# Altium PCB ControllerMain_V1.PcbDoc (part 2 of 2)
Units mil, origin at the board's own origin, x right, y up, seen from the top; angles counter-clockwise.
Board outline 3937.01 x 590.55 mil, 4 copper layers (Top Layer, Layer 1, Layer 2, Bottom Layer), stack 23.756 mil thick; 51 components, 76 nets, 244 pads, 93 vias.
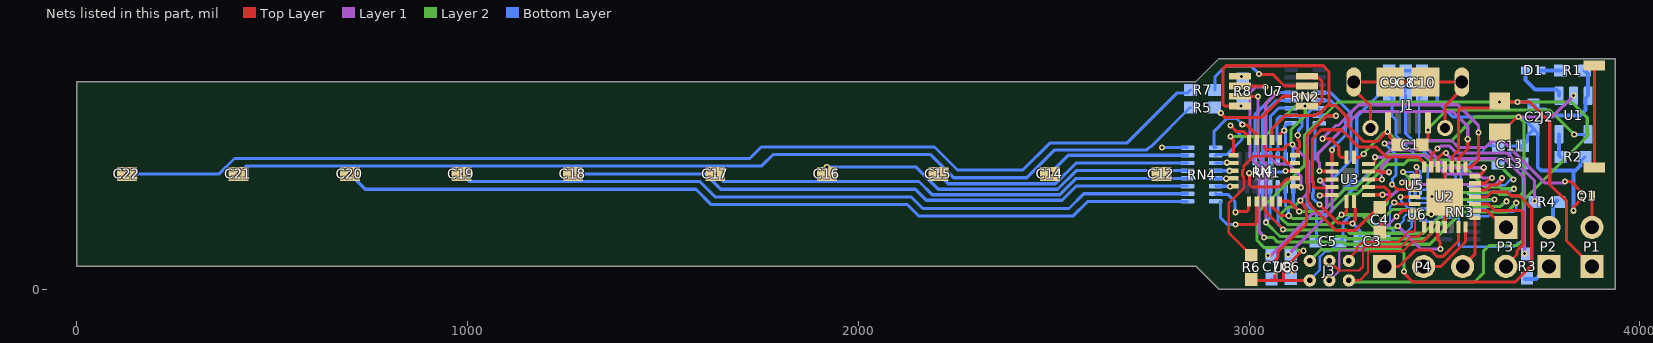
[diagram p4: the nets of this part, all layers, seen from the top]

## Part data
C1: library part CAP_4U7_0603, "CAP CER 4.7UF 25V X5R 0603", Supplier Part Number 1=445-9050-1-ND, LatestRevisionDate=17-Jul-2002, LatestRevisionNote="Re-released for DXP Platform.", PackageDescription="Radial Cap, Thru-Hole; 2 Leads; 0.3 in Pin Spacing", PackageReference=RAD-0.3, Published=8-Jun-2000, Publisher="Altium Limited", Supplier 1=Digi-Key
C2: library part CAP_10U_0603, "CAP CER 10UF 10V X5R 0603", Supplier Part Number 1=490-10474-1-ND, LatestRevisionDate=17-Jul-2002, LatestRevisionNote="Re-released for DXP Platform.", PackageDescription="Radial Cap, Thru-Hole; 2 Leads; 0.3 in Pin Spacing", PackageReference=RAD-0.3, Published=8-Jun-2000, Publisher="Altium Limited", Supplier 1=Digi-Key
C3 C4 C5 C6 C7 C8 C9 C10 C11 C13: library part CAP_1U_0603, "CAP CER 1UF 50V X7R 0603", Supplier Part Number 1=490-12330-1-ND, LatestRevisionDate=17-Jul-2002, LatestRevisionNote="Re-released for DXP Platform.", PackageDescription="Radial Cap, Thru-Hole; 2 Leads; 0.3 in Pin Spacing", PackageReference=RAD-0.3, Published=8-Jun-2000, Publisher="Altium Limited", Supplier 1=Digi-Key
C12: library part CAP_TOUCH_SLIDE1_END2, "Touch Sensor Pad, Slide Style 1", LatestRevisionDate=17-Jul-2002, LatestRevisionNote="Re-released for DXP Platform.", PackageDescription="Radial Cap, Thru-Hole; 2 Leads; 0.3 in Pin Spacing", PackageReference=RAD-0.3, Published=8-Jun-2000, Publisher="Altium Limited"
C14 C15 C16 C17 C18 C19 C20 C21: library part CAP_TOUCH_SLIDE1, "Touch Sensor Pad, Slide Style 1", LatestRevisionDate=17-Jul-2002, LatestRevisionNote="Re-released for DXP Platform.", PackageDescription="Radial Cap, Thru-Hole; 2 Leads; 0.3 in Pin Spacing", PackageReference=RAD-0.3, Published=8-Jun-2000, Publisher="Altium Limited"
C22: library part CAP_TOUCH_SLIDE1_END1, "Touch Sensor Pad, Slide Style 1", LatestRevisionDate=17-Jul-2002, LatestRevisionNote="Re-released for DXP Platform.", PackageDescription="Radial Cap, Thru-Hole; 2 Leads; 0.3 in Pin Spacing", PackageReference=RAD-0.3, Published=8-Jun-2000, Publisher="Altium Limited"
D1: "LED GREEN CLEAR CHIP SMD", Supplier Part Number 1=754-1101-1-ND, Supplier 1=Digi-Key
J1: library part MicroUSB, "SMD+DIP Micro USB; MICRO-B-SMD", Package=None, Supplier Part Number 1=H125272CT-ND, Availability=Unavailable, MF=Hirose, MP=ZX62D-B-5P8, Price=None, SnapEDA_Link=https://www.snapeda.com/parts/ZX62D-B-5P8/Hirose%20Electric%20Co%20Ltd/view-part/?ref=snap, Supplier 1=Digi-Key
J2: library part SNAPBEE_DF59-2S-2V, "CONN SSL RCPT 2POS 2MM SOLDER", Supplier Part Number 1=H11961CT-ND, Supplier 1=Digi-Key, Supplier 2=Digi-Key, Supplier 3=Digi-Key, Supplier Part Number 2=H11958-ND, Supplier Part Number 3=H11957CT-ND
J3: library part ISP_TINY
P1: "Polarity"
Q1: "MOSFET N-CH 30V 3.1A 3PICOSTAR", Package=None, Supplier Part Number 1=296-38913-1-ND, Availability=Unavailable, MF="{'manufacturer': u'Texas Instruments'}", MP=CSD17381F4, Price=None, Supplier 1=Digi-Key
R1: library part RES_220R_0603, "RES SMD 220 OHM 1% 1/10W 0603", Supplier Part Number 1=541-220HCT-ND, LatestRevisionDate=17-Jul-2002, LatestRevisionNote="Re-released for DXP Platform.", PackageDescription="Axial Device, Thru-Hole; 2 Leads; 0.3 in Pin Spacing", PackageReference=AXIAL-0.3, Published=8-Jun-2000, Publisher="Altium Limited", Supplier 1=Digi-Key
R2: library part RES_2K2_0603, "RES SMD 2.2K OHM 1% 1/10W 0603", Supplier Part Number 1=311-2.20KHRCT-ND, LatestRevisionDate=17-Jul-2002, LatestRevisionNote="Re-released for DXP Platform.", PackageDescription="Axial Device, Thru-Hole; 2 Leads; 0.3 in Pin Spacing", PackageReference=AXIAL-0.3, Published=8-Jun-2000, Publisher="Altium Limited", Supplier 1=Digi-Key
R3 R4: library part RES_100R_0603, "RES SMD 100 OHM 1% 1/10W 0603", Supplier Part Number 1=311-100HRCT-ND, LatestRevisionDate=17-Jul-2002, LatestRevisionNote="Re-released for DXP Platform.", PackageDescription="Axial Device, Thru-Hole; 2 Leads; 0.3 in Pin Spacing", PackageReference=AXIAL-0.3, Published=8-Jun-2000, Publisher="Altium Limited", Supplier 1=Digi-Key
R5 R7: library part RES_4K99_0603, "RES SMD 4.99K OHM 1% 1/10W 0603", Supplier Part Number 1=541-4.99KHCT-ND, LatestRevisionDate=17-Jul-2002, LatestRevisionNote="Re-released for DXP Platform.", PackageDescription="Axial Device, Thru-Hole; 2 Leads; 0.3 in Pin Spacing", PackageReference=AXIAL-0.3, Published=8-Jun-2000, Publisher="Altium Limited", Supplier 1=Digi-Key
R6 R8: library part RES_10K_0603, "RES SMD 10K OHM 1% 1/10W 0603", Supplier Part Number 1=311-10.0KHRCT-ND, LatestRevisionDate=17-Jul-2002, LatestRevisionNote="Re-released for DXP Platform.", PackageDescription="Axial Device, Thru-Hole; 2 Leads; 0.3 in Pin Spacing", PackageReference=AXIAL-0.3, Published=8-Jun-2000, Publisher="Altium Limited", Supplier 1=Digi-Key
RN1: "RES ARRAY 15 RES 6.8K OHM 1506", Package=None, Supplier Part Number 1=U6682CT-ND, Availability=Unavailable, MF="{'manufacturer': u'Panasonic'}", MP=EXB-Q16P682J, Price=None, Supplier 1=Digi-Key
RN2 RN3 RN4: "RES ARRAY 8 RES 4.7K OHM 1506", Package=None, Supplier Part Number 1=Y1472CT-ND, Availability=Unavailable, MF="{'manufacturer': u'Panasonic'}", MP=EXB-Q16P682J, Price=None, Supplier 1=Digi-Key
U1: "IC BATT CNTL LI-ION 1CEL SOT23-5", Package=None, Supplier Part Number 1=MCP73831T-4ADI/OTCT-ND, Availability=Unavailable, MF="{'manufacturer': u'Microchip'}", MP=MCP73831T-4ADI/OT, Price=None, Supplier 1=Digi-Key
U2: "IC MCU 8BIT 32KB FLASH 28VQFN", Package="PDIP-28 Microchip", Supplier Part Number 1=ATMEGA328-MMHRCT-ND, Availability=Unavailable, MF=Microchip, MP=ATMEGA328P-PU, Price=None, SnapEDA_Link=https://www.snapeda.com/parts/ATMEGA328P-PU/Microchip/view-part/?ref=snap, Supplier 1=Digi-Key
U3: "IC INVERTER 6CH 6-INP 14DHVQFN", Supplier Part Number 1=1727-6943-1-ND, Supplier 1=Digi-Key
U4: "IC PROXIMITY DETECTOR 20UQFN", Supplier Part Number 1=MTCH108-I/GZ-ND, Supplier 1=Digi-Key
U5 U6: "IC INVERTER 2CH 2-INP 6MICROPAK2", Supplier Part Number 1=NC7WZ14FHXCT-ND, Supplier 1=Digi-Key
U7: "IC PROXIMITY DETECTOR 8MSOP", Supplier Part Number 1=MTCH102-I/MS-ND, Supplier 1=Digi-Key
U8: "IC REG LINEAR 3.3V 100MA HSNT4-B", Supplier Part Number 1=1662-S-1318D33-A4T2U4CT-ND, Supplier 1=Digi-Key

## Via types
v1: diameter 15.75, hole 7.87, Top Layer to Bottom Layer, 57 vias
v2: diameter 15.75, hole 7.87, Top Layer to Bottom Layer, tented both sides, 36 vias

## Nets (pads, with @x,y where several pads share a name; then routed paths per layer and width w, separated by ;. In a path a pad name is that pad's centre, name@x,y a point inside that pad or via, vN(x,y) a via of type N, cw(c..) or ccw(c..) an arc to the next point about the centre after c; other vN are vias at no path point)
5V: C1.2 J1.1 U1.4 | length 525.4
  Top Layer w8: C1.2@3443.41,370.08 3444.16,370.08 3455.91,381.83 3455.91,382.58 3457.68,384.35 J1.1@3457.68,403.06 ; J1.1@3457.68,425.2 J1.1@3457.68,403.06 ; v1(3458,408) 3458,403.38 J1.1@3457.68,403.06
  Layer 2 w8: v1(3458,408) 3458,411.1 3505.83,458.93 3769.39,458.93 v1(3832.36,395.97)
  Bottom Layer w8: v1@3832.8,396.06 3833.2,396.46 U1.4@3868.11,396.46
B1: C3.2 RN2.16 U3.1 | length 448.1
  Top Layer w8: v1(3180.76,216.8) 3180.76,216.1 3226.93,169.93 3258.8,169.93 3263.23,169.93 v2(3264.72,168.45) 3264.72,169.72 3272,177.01 3272,206.94 3270.1,208.84 3270.1,223.44 U3.1@3268.98,224.56
  Bottom Layer w8: RN2.16@3179.8,424.37 3170.84,424.37 3169.13,422.66 3169.13,335.12 3162.67,328.66 3162.67,275.44 3164.62,273.49 3164.62,247.08 3163.18,245.64 3163.18,232.65 3179.03,216.8 v1(3180.76,216.8) ; v2(3264.72,168.45) 3265.4,168.45 3283.79,150.06 C3.2@3283.79,123.06
B2: C4.2 RN2.15 U3.3 | length 665.6
  Top Layer w8: v1(3222.8,444.06) 3198.89,444.06 3148.67,393.83 3148.67,269.64 3150.62,267.69 3150.62,225.44 3156.75,219.31 3156.75,215.53 3221.71,150.57 3257.31,150.57 3272.12,150.57 3318.05,196.5 3322.25,196.5 3327.8,202.05 3327.8,216.31 3341.02,216.31 3359.52,234.81 3359.52,249.09 3351.77,256.84 3351.13,256.84 3348.41,259.56 3348.15,259.56 3346.34,261.37 U3.3@3305.8,261.37
  Bottom Layer w8: RN2.15@3179.8,444.06 v1(3222.8,444.06)
B3: C5.2 RN2.14 U3.5 | length 660.8
  Top Layer w8: U3.5@3305.8,300.74 3306.91,301.86 3322.21,301.86 3323.41,303.06 3334.52,303.06 3338,299.58 v2(3358.4,299.58)
  Bottom Layer w8: C5.2@3170.79,123.06 3172.8,125.06 3172.8,191.06 ; RN2.14@3178.77,462.03 3162.07,462.03 3149.27,449.23 3149.27,359.73 3148.67,359.13 3148.67,269.64 3150.62,267.69 3150.62,252.88 3149.18,251.44 3149.18,214.67 3172.8,191.06 ; v2(3358.4,299.58) 3337,299.58 3334.52,302.06 3311.8,302.06 3200.8,191.06 3172.8,191.06
B4: C6.2 RN2.13 U3.9 | length 533.7
  Top Layer w8: U3.9@3212.49,320.43 v1@3212.49,353.63
  Layer 1 w8: v2(3100.39,88.58) 3212.43,200.63 3212.43,355.57 v1(3212,356)
  Bottom Layer w8: RN2.13@3179.8,483.43 3180.41,482.81 3209.32,482.81 3246.8,445.33 3246.8,394.15 3212,359.36 v1(3212,356)
B5: C7.1 RN2.12 U3.11 | length 633.3
  Top Layer w8: v2(3181.9,278.06) 3182.64,278.06 3184.52,279.94 3211.37,279.94 U3.11@3212.49,281.06
  Layer 1 w8: v1(3049,86) 3055.27,86 3163.32,194.06 3184,194.06 3198.93,208.99 3198.93,261.03 v2(3181.9,278.06)
  Bottom Layer w8: RN2.12@3179.8,503.11 3180.29,502.61 3209.32,502.61 3260.8,451.13 3260.8,329.36 3209.49,278.06 v2(3181.9,278.06)
BRIGHT1: RN1.15 RN2.1 U4.16 | length 136.7
  Top Layer w8: U4.16@3078.8,382.06 3080.4,383.66 3080.4,396.4 v2(3090,406)
  Bottom Layer w8: RN1.15@3093.48,334.06 3093.48,406.06 3093.43,406 v2(3090,406) 3091.48,407.48 3091.48,417.98 3094.23,420.72 3094.23,422.66 3095.94,424.37 RN2.1@3107.75,424.37
BRIGHT2: RN1.14 RN2.2 U4.15 | length 266.4
  Top Layer w8: U4.15@3118.17,342.68 3123.19,342.68 3124.8,344.29 3124.8,358.67 3129.23,363.1 3129.23,377.91 3124.99,382.15 3124.99,393.86 v2(3124.8,394.06)
  Bottom Layer w8: RN1.14@3073.8,334.06 3073.8,379.21 3071.17,381.83 3071.17,433.93 3079.59,442.35 3106.04,442.35 RN2.2@3107.75,444.06 ; RN2.2@3119.8,446.06 3121.76,446.06 3135.27,432.55 3135.27,416.19 3126.28,407.2 3126.28,395.54 v2(3124.8,394.06)
BRIGHT3: RN1.13 RN2.3 U4.13 | length 260.4
  Top Layer w8: v2(3093.8,302.66) 3094.12,302.99 3117.84,302.99 U4.13@3118.17,303.31
  Bottom Layer w8: RN1.13@3053.8,328.06 3053.8,306.06 3059.8,300.06 3086.8,300.06 3087.92,301.18 3092.31,301.18 v2(3093.8,302.66) ; RN1.13@3054.11,334.06 3054.8,334.74 3054.8,442.06 3076.48,463.74 RN2.3@3107.75,463.74
BRIGHT4: RN1.12 RN2.4 U4.12 | length 409.2
  Top Layer w8: v2(3000.55,297.06) 3000.82,296.78 3000.82,267.71 3006.48,262.06 3076.8,262.06 3096.76,282.02 3116.56,282.02 U4.12@3118.17,283.63
  Bottom Layer w8: v2(3000.55,297.06) 3002.03,298.54 3014.92,298.54 3032.72,316.33 3032.72,325.98 RN1.12@3032.8,326.06 ; RN1.12@3034.43,334.06 3034.43,446.68 3071.17,483.43 RN2.4@3107.75,483.43
BRIGHT5: RN1.11 RN2.5 U4.11 | length 554.3
  Top Layer w8: U4.11@3118.17,263.94 3119.77,262.34 3128.6,262.34 3130.65,260.29 v1(3132.75,260.29)
  Layer 1 w8: v2(3070.8,503.06) 3042.8,475.06 3042.8,349.06 3071.32,320.54 3101.2,320.54 3132.75,288.99 v1(3132.75,260.29)
  Bottom Layer w8: RN1.11@3014.74,334.06 3015.8,335.11 3015.8,447.85 3071.05,503.11 RN2.5@3107.75,503.11
GND: C1.1 C2.1 C3.1 C4.1 C5.1 C6.1 C7.2 C8.1 C9.1 C10.1 C11.1 C13.2 J1.5 J2.2 J3.6 Q1.3 R2.1 R6.1 R8.2 U1.2 U2.4 U2.18 U2.29 U3.7 U4.17 U5.2 U6.2 U7.8 U8.2 U8.5 | length 4192.4
  Top Layer w8: U7.8@2976.8,469.06 2937.8,469.06 2933.07,473.78 2933.07,563.33 2941.8,572.06 3189.8,572.06 3204.8,557.06 3204.8,474.41 3201.12,470.73 ; R6.1@3005.8,25.05 3008.21,22.64 3149.38,22.64 J3.6@3150.8,24.06 ; U4.17@3059.11,382.06 3059.11,411.37 3092.8,445.06 3171.8,445.06 3177.3,450.56 3180.94,450.56 3201.12,470.73 ; 3066.8,23.06 3066.93,23.19 U8.2@3066.93,42.26 ; U8.5@3087.8,55.06 3087.8,24.06 3088.8,23.06 ; U3.7@3268.98,337.55 3282.7,337.55 3287.19,342.05 3287.75,342.05 3291.62,345.92 v1(3293.72,345.92) ; C4.1@3335,147 3342.8,154.79 3341,156.59 v2(3341,177) ; v1(3354.8,403.06) 3354.36,402.62 3351.44,402.62 3326.61,377.8 3294.06,377.8 3254.09,417.76 3254.09,438.03 3221.39,470.73 3204.8,470.73 3201.12,470.73 ; J1.5@3359.19,403.06 3359.19,391.54 3380.65,370.08 C1.1@3381.4,370.08 ; U2.18@3501.19,159.25 U2.29@3501.19,236.25 U2.4@3501.19,313.25 ; J2.2@3641.73,402.56 3647.64,402.56 3684.65,439.57 3688.31,439.57 v1(3689.8,441.06) ; v2(3830.67,201.06) 3830.67,201.93 3830.8,202.06 3830.8,211.15 Q1.3@3851.81,232.17
  Layer 1 w8: v1(3689.8,441.06) 3776.49,441.06 3830.98,495.54 v1(3830.98,496.16)
  Layer 2 w8: v1(3293.72,345.92) 3293.72,348.02 3297.59,351.89 3297.59,352.59 3346.57,401.57 3353.31,401.57 v1(3354.8,403.06) 3378.8,379.06 3516.8,379.06 3578.8,441.06 v1(3689.8,441.06) 3689.8,440.95 3703.8,426.95 3703.8,249.06 3693.92,239.18 3670.39,239.18 3666.52,243.06 3640.8,243.06 3635.8,248.06 3531.69,248.06 3521.33,237.69 v1(3468.34,237.69) ; v2@3344.15,181.41 3347.06,181.41 3349.35,183.7 3349.35,186.61 3366.67,203.93 3411.38,203.93 3423.36,191.94 v1(3466.45,191.94)
  Bottom Layer w6: J3.6@3155.71,23.97 3180.96,49.22 3180.96,82.89 3195.46,97.39 3206.38,97.39 3232.05,123.06 C5.1@3232.8,123.06 ; U5.2@3424.8,252.06 3425.54,251.31 3425.54,236.57 3429.29,232.82 3464.83,232.82 3468.34,236.33 v1(3468.34,237.69) ; U6.2@3452.8,191.06 3465.56,191.06 v1(3466.45,191.94)
  Bottom Layer w8: C7.2@3057.8,26.05 3061.21,22.64 3152.38,22.64 J3.6@3152.8,23.06 ; J3.6@3155.71,22.64 J3.6@3155.71,23.97 ; C5.1@3232.8,123.06 3240.92,131.18 3240.92,169.93 3261.05,190.06 3298.8,190.06 3324.3,164.56 ; C3.1@3345.8,123.06 3345.05,123.06 3333.3,134.8 3333.3,155.55 3324.3,164.56 ; v2@3345.8,178.06 3344.69,178.06 3331.19,164.56 3324.3,164.56 ; C9.1@3358.8,559.06 C8.1@3400.8,559.06 C10.1@3442.8,559.06 3442.8,558.31 3481.8,519.31 3481.8,481.06 3521.8,441.06 v1(3689.8,441.06) 3691.28,439.57 3699.47,439.57 3728.35,410.69 C2.1@3728.35,409.94 3728.35,409.19 3712.3,393.14 3712.3,378.8 3700.55,367.06 C11.1@3699.8,367.06 3672.48,367.06 3667.8,362.37 3667.8,334.74 3663.11,330.06 3644.79,330.06 C13.2@3636.79,322.06 ; 3848.07,316.93 3848.13,316.98 3848.13,326.96 R2.1@3859.74,338.58
  Bottom Layer w10: C2.1@3728.35,409.94 3739.09,399.19 3739.09,312.09 3747.05,304.13 3830.67,304.13 ; v2(3830.67,201.06) 3830.67,304.13 ; R2.1@3848.24,327.83 3848.24,316.75 3835.63,304.13 3835.28,304.13 3830.67,304.13
  other v1: 2979,469
IO1_SCK: P3.2 U2.24 | length 287.5
  Top Layer w8: U2.24@3578.19,218.25 3612.36,218.25 3629.55,201.06 3696.11,201.06 3700.8,196.37 3700.8,113.06 3685.91,98.17 3685.91,88.76 3657.48,60.33 P3.2@3657.48,58.46
IO1_SDA: P3.1 U2.23 | length 97
  Top Layer w8: U2.23@3578.19,201.25 3609.56,201.25 3626.82,183.99 3631.95,183.99 P3.1@3657.48,158.46
IO2: P4.3 U2.22 | length 138.2
  Top Layer w8: P4.3@3546.85,58.07 3578.19,89.41 U2.22@3578.19,183.25
IO3: P4.2 U2.21 | length 171.3
  Top Layer w8: P4.2@3446.85,58.07 3490.61,58.07 3554.19,121.65 U2.21@3554.19,159.25
IO4: P4.1 U2.20 | length 266
  Top Layer w8: P4.1@3346.85,58.07 3383.81,58.07 3425.8,100.06 3465.8,100.06 3482.48,83.37 3496.11,83.37 3536.19,123.45 U2.20@3536.19,159.25
LED_PWR: Q1.2 U2.10 | length 764.3
  Top Layer w8: v2(3365.9,267.99) 3367.09,267.99 3379.9,255.18 3399.2,255.18 3399.77,255.75 3422.69,255.75 U2.10@3424.19,254.25 ; v1(3808.8,276.06) 3823.08,276.06 Q1.2@3852.08,247.06
  Layer 1 w8: v2(3347.11,373.02) 3348.29,374.19 3429.83,374.19 3436.43,380.79 3518.23,380.79 3535.96,363.06 3605.32,363.06 3619.64,377.38 3651.64,377.38 3756.64,272.38 3803.02,272.38 3806.7,276.06 v1(3808.8,276.06)
  Bottom Layer w8: v2(3347.11,373.02) 3376.27,343.86 3376.27,292.18 3367.38,283.28 3367.38,269.47 v2(3365.9,267.99)
LEDOUT: P1.2 Q1.1 | length 74.5
  Top Layer w8: P1.2@3876.8,165.06 3877.87,166.13 3877.87,238.98 Q1.1@3877.8,239.06
MISO: J3.1 U2.14 | length 242.1
  Top Layer w6: J3.1@3255.71,72.64 3255.71,79 3275.8,99.08 3275.8,106.07 3290.78,121.06 3382.8,121.06 3408.8,147.06 3421.28,147.06 3424.8,150.57 3424.8,182.65 U2.14@3424.19,183.25
MOSI: J3.4 U2.13 | length 320.9
  Top Layer w8: v2(3377.8,186.06) 3378.08,186.06 3393.28,201.25 U2.13@3424.19,201.25
  Layer 1 w6: J3.4@3206.38,22.64 3230.8,47.06 3230.8,95.54 3234.31,99.06 3290.8,99.06 v2(3377.8,186.06)
  Layer 1 w8: J3.4@3205.71,22.64 J3.4@3206.38,22.64
MTSA1: R6.2 U4.14 | length 421
  Top Layer w7: R6.2@3005.8,87.06 3005.8,87.81 2993.55,100.06 2992.8,100.06 2948.42,144.43 2948.42,220.68 2976.58,248.84 2977.42,248.84 2982.98,254.4 2982.98,255.24 2986.8,259.06 2986.8,286.24 2983.18,289.86 2983.18,304.25 2986.8,307.87 2986.8,316.06 3010.8,340.06 3066.83,340.06 3068.83,338.06 3082.8,338.06 3097.85,323 U4.14@3118.17,323
MTSA2: R8.1 U7.5
  other v1: 2980.8,544.06
NetC12_1: C12.1 RN4.16 | length 67.9
  Bottom Layer w8: v1@2775.59,364.17 v1(2777.28,362.48) RN4.16@2842.75,362.48
NetC14_1: C14.1 RN4.15 | length 369.3
  Bottom Layer w8: v1(2492.95,297.09) 2492.95,298.07 2537.68,342.8 RN4.15@2842.75,342.8
NetC15_1: C15.1 RN4.14 | length 670.6
  Bottom Layer w8: v1(2204.72,295.28) 2230.15,269.85 2504.1,269.85 2557.36,323.11 RN4.14@2842.75,323.11
NetC16_1: C16.1 RN4.13 | length 966.9
  Bottom Layer w8: v1(1919.29,313.15) 2147.48,313.15 2204.78,255.85 2509.9,255.85 2557.48,303.43 RN4.13@2842.75,303.43
NetC17_1: C17.1 RN4.12 | length 1248.4
  Bottom Layer w8: v1(1633.86,295.28) 1653.54,275.59 2155.51,275.59 2189.25,241.85 2515.7,241.85 2557.59,283.74 RN4.12@2842.75,283.74
NetC18_1: C18.1 RN4.11 | length 1616
  Bottom Layer w8: v1(1269.69,295.28) 1608.58,295.28 1647.95,255.91 2145.67,255.91 2173.73,227.85 2521.5,227.85 2557.7,264.06 RN4.11@2842.75,264.06
NetC19_1: C19.1 RN4.10 | length 1910.8
  Bottom Layer w8: v1(984.25,295.28) 1003.94,275.59 1594.49,275.59 1633.86,236.22 2135.83,236.22 2165.35,206.69 2539.37,206.69 2577.05,244.37 RN4.10@2842.75,244.37
NetC20_1: C20.1 RN4.9 | length 2204.4
  Bottom Layer w8: v1(698.82,295.28) 738.19,255.91 1584.65,255.91 1624.02,216.54 2125.98,216.54 2155.51,187.01 2549.21,187.01 2586.89,224.69 RN4.9@2842.75,224.69
NetC21_1: C21.1 R5.1 | length 2555.7
  Bottom Layer w8: v1(413.39,295.28) 433.07,314.96 1751.97,314.96 1781.5,344.49 2185.04,344.49 2244.09,285.43 2431.1,285.43 2502.46,356.8 2738.69,356.8 2746.06,364.17 2748.16,364.17 2849.04,465.06 R5.1@2849.79,465.06
NetC22_1: C22.1 R7.1 | length 2859.7
  Bottom Layer w8: v1(127.95,295.28) 364.17,295.28 403.54,334.65 1722.44,334.65 1751.97,364.17 2194.88,364.17 2253.94,305.12 2421.26,305.12 2490.16,374.02 2687.01,374.02 2814.96,501.97 2841.7,501.97 R7.1@2849.79,510.06
NetD1_1: D1.1 U1.1 | length 132.5
  Bottom Layer w10: D1.1@3707.68,560.04 3707.68,535.43 3731.87,511.24 3786.89,511.24 3793.31,504.82 U1.1@3793.31,495.28
NetD1_2: D1.2 R1.1 | length 49.7
  Bottom Layer w10: D1.2@3747.05,560.04 R1.1@3796.75,560.04
NetJ1_S1: J1.S1 J1.S2 J1.S3 J1.S4 J1.S5 J1.S6 | length 548.3
  Top Layer w8: J1.S2@3311.02,412.4 3311.02,469 3268.21,511.81 J1.S6@3268.21,530.51 J1.S5@3361.22,530.51 J1.S4@3451.77,530.51 J1.S3@3544.78,530.51 3544.78,511.81 3501.97,469 J1.S1@3501.97,412.4
NetJ2_S1: J2.S1 J2.S2 | length 262.3
  Top Layer w8: J2.S1@3881.8,573.06 3883.86,570.99 J2.S2@3883.86,311.61
NetR2_2: R2.2 U1.5 | length 59.7
  Bottom Layer w10: U1.5@3793.31,396.46 3793.31,343.01 R2.2@3797.74,338.58
NetR3_2: R3.2 U2.5 | length 469.4
  Top Layer w8: U2.5@3483.19,313.25 3484.69,314.75 3484.69,336.15 3495.97,347.43 3502.31,347.43 v2(3503.8,348.92)
  Layer 1 w8: v2(3503.8,348.92) 3503.8,348.04 3517.78,334.06 3654.8,334.06 3705,283.85 v1(3705,91)
NetR4_2: R4.2 U2.6 | length 400.7
  Top Layer w8: U2.6@3466.19,313.25 3466.19,343.45 3482.8,360.06 v1(3482.8,360.18)
  Layer 1 w8: v1(3482.8,360.18) 3484.89,360.18 3491.5,366.79 3512.43,366.79 3530.17,349.06 3659.8,349.06 3730.8,278.06 v1(3730.8,226.06)
  Bottom Layer w8: R4.2@3723.8,227.06 3724.8,226.06 v1(3730.8,226.06)
NetR5_2: R5.2 U7.2 | length 248.3
  Top Layer w8: v2@2927.3,450.56 2937.92,439.93 3032.95,439.93 3087.07,494.06 U7.2@3148.8,494.06
  other v2: 2927.8,451.06
NetR7_2: R7.2 U7.3 | length 304.5
  Top Layer w8: v2@3023.8,551.06 3024.8,550.06 3060.8,550.06 3090.8,520.06 U7.3@3148.8,520.06
  Bottom Layer w8: R7.2@2912.8,510.06 2912.8,544.06 2939.8,571.06 3005.68,571.06 v2(3025.89,550.85)
NetRN4_1: RN4.1 U4.19 | length 200.4
  Top Layer w8: v1(2982.8,422.06) 2984.28,420.57 2994.08,420.57 3018.13,396.52 3018.13,380.72 U4.19@3018.8,380.06
  Bottom Layer w8: RN4.1@2914.8,362.48 2911.63,362.48 2909.92,364.19 2909.92,403.46 2943.39,436.93 2967.92,436.93 v1(2982.8,422.06)
NetRN4_2: RN4.2 U4.20 | length 196.4
  Top Layer w8: v2(2952.8,419.06) 2967.67,404.18 2985.12,404.18 3001.66,387.64 U4.20@3001.66,385.06
  Bottom Layer w8: RN4.2@2914.8,342.8 2916.5,344.5 2943.31,344.5 2982.02,383.21 2982.02,389.83 v2(2952.8,419.06)
NetRN4_3: RN4.3 U4.2 | length 29
  Bottom Layer w8: RN4.3@2914.8,323.11 2915.2,323.52 2943.08,323.52 v2(2943.49,323.92)
NetRN4_4: RN4.4 U4.3 | length 35.1
  Bottom Layer w8: RN4.4@2914.8,303.43 2914.95,303.27 2949.64,303.27 v2(2949.8,303.11)
NetRN4_5: RN4.5 U4.4 | length 27.3
  Bottom Layer w8: RN4.5@2914.8,283.74 2915.22,283.32 2941.35,283.32 v2(2941.77,282.9)
NetRN4_6: RN4.6 U4.5 | length 34.4
  Bottom Layer w8: RN4.6@2914.8,264.06 2915.3,263.56 2948.3,263.56 v2@2948.8,264.06
  other v2: 2951.8,263.06
NetRN4_7: RN4.7 U4.6 | length 139.6
  Top Layer w8: v1(2965.8,197.06) 2967.28,198.54 2994.11,198.54 2998.8,203.22 U4.6@2998.8,222.06
  Bottom Layer w8: RN4.7@2914.8,244.37 2916.5,242.66 2945.19,242.66 2964.31,223.54 2964.31,198.54 v1(2965.8,197.06)
NetRN4_8: RN4.8 U4.7 | length 197.1
  Top Layer w8: v1(2965.8,166.06) 3015.05,166.06 3019.74,170.74 U4.7@3019.74,224.57
  Bottom Layer w8: RN4.8@2925.89,224.06 2926.97,222.98 2926.97,182.88 2943.8,166.06 v1(2965.8,166.06)
PB1: U2.11 U6.6 | length 83.2
  Top Layer w8: v2(3388.03,236.27) U2.11@3424.19,236.25
  Bottom Layer w6: v2(3388.03,236.27) 3389.2,235.11 3389.2,225.57 3409.19,205.57 3415.68,205.57 U6.6@3416.43,204.83
PB2: U2.12 U6.4 | length 207.6
  Top Layer w8: v1(3371.8,221.8) 3373.28,220.32 3378.71,220.32 3380.84,218.18 3424.12,218.18 U2.12@3424.19,218.25
  Bottom Layer w6: v1(3371.8,221.8) 3360.92,210.93 3360.92,158.07 3374.81,144.18 3401.16,144.18 3416.43,159.45 U6.4@3416.43,177.28
PD0: U2.26 U3.2 | length 443
  Top Layer w8: U3.2@3305.8,241.68 3305.9,241.79 3341.22,241.79 v2(3341.33,241.89) ; U2.26@3578.19,254.25 3607.17,254.25 3620.07,267.15 3636.89,267.15 v2@3649.8,280.06
  Layer 1 w8: v2(3341.33,241.89) 3341.97,242.53 3369,242.53 3381.52,255.06 3407.8,255.06 3420.8,268.06 3583.8,268.06 3584.67,267.18 3629.92,267.18 v2(3647.8,285.06)
PD1: U2.27 U3.4 | length 436
  Top Layer w8: U3.4@3305.8,281.06 v1@3339.8,281.06 ; U2.27@3578.19,271.25 3604.37,271.25 3616.69,283.57 3620.31,283.57 v1(3621.8,285.06)
  Layer 1 w8: v1(3340.8,281.06) 3339.31,282.54 3339.31,293.39 3338.05,294.65 3338.05,313.31 3366.8,342.06 3454,342.06 3501,295.06 3586.8,295.06 3596.8,285.06 v1(3621.8,285.06)
PD2: U2.28 U3.6 | length 375.5
  Top Layer w8: U3.6@3305.8,320.43 3317.61,320.43 3322.9,325.72 3322.8,325.83 v1(3322.8,337.92) ; U2.28@3578.19,289.25 3587.69,289.25 3600.8,302.36 v1@3600.8,310.06
  Layer 1 w8: v1@3322.8,341.95 v1(3322.8,337.92) 3342.86,337.92 3361,356.06 3459.8,356.06 3504.8,311.06 v1(3600.8,311.06)
PD3: U2.1 U3.8 | length 679.1
  Top Layer w8: v1(3187.66,385.19) 3208.93,385.19 3229.67,364.46 3229.67,344.18 3236.3,337.55 U3.8@3249.3,337.55 ; U2.1@3554.19,313.25 3568.99,313.25 3587.8,332.06 v1(3587.8,400.97)
  Layer 1 w8: v1(3187.66,385.19) 3221.64,419.18 3228.2,419.18 3281.07,472.06 3533.8,472.06 3587.8,418.06 v1(3587.8,400.97)
PD4: U2.2 U3.10 | length 626.6
  Top Layer w8: v2(3180.54,303.06) 3181.74,301.86 3199.99,301.86 U3.10@3201.8,300.06 ; U2.2@3536.19,313.25 3537.69,314.75 3537.69,336.87 3548.87,348.06 3548.8,348.06 3559.8,359.06 v1(3559.8,384.06)
  Layer 1 w8: v2(3180.54,303.06) 3180.54,323.69 3175.8,328.44 3175.8,346.98 3283.87,455.06 3521.8,455.06 3559.8,417.06 v1(3559.8,384.06)
PD5: U2.7 U3.12 | length 513
  Top Layer w8: U3.12@3212.49,261.37 3211.37,260.25 3196.07,260.25 3194.87,259.06 3169.31,259.06 3164.62,263.74 3164.62,273.49 3162.67,275.44 3162.67,385.48 3185.24,408.06 3236.8,408.06 3281.06,363.8 3326.33,363.8 3352.07,338.06 3432.89,338.06 3448.19,322.75 U2.7@3448.19,313.25
PD6: U2.8 U5.6 | length 62.2
  Top Layer w8: U2.8@3428.8,289.06 3426.8,291.06 3428.82,293.07 v1(3428.82,313.17)
  Bottom Layer w6: v1(3428.82,313.17) 3428.82,311.52 3433.28,307.06 3438.54,301.8 3438.54,280.83 U5.6@3438.57,280.8
PD7: U2.9 U5.4 | length 55.4
  Top Layer w8: v1@3391.8,272.65 3422.79,272.65 U2.9@3424.19,271.25
  Bottom Layer w6: v1(3391.8,273.06) 3392.07,273.06 3399.81,280.8 U5.4@3411.02,280.8
RST: J3.5 U2.25 | length 971.8
  Top Layer w8: v2@3395.8,42.06 3419.8,18.06 3680.8,18.06 3723.8,61.06 3723.8,207.58 3692.2,239.18 3670.39,239.18 3660.63,248.95 3621.66,248.95 3608.97,236.25 U2.25@3578.19,236.25
  Layer 2 w8: J3.5@3157.13,74.06 3184.13,101.06 3387.97,101.06 3396.66,92.37 v2(3396.66,45.19)
S1: C8.2 RN3.16 U3.13 | length 765.8
  Top Layer w8: v2(3181.06,240.06) 3181.87,240.87 3211.67,240.87 U3.13@3212.49,241.68
  Bottom Layer w8: v2(3181.06,240.06) 3227.8,240.06 3275.8,288.06 3275.8,441.06 3328.8,494.06 3328.8,521.37 3333.48,526.06 3394.11,526.06 3398.8,521.37 C8.2@3398.8,505.06 ; C8.2@3400.8,497.05 3400.8,398.53 3502.8,296.53 RN3.16@3502.8,265.74
S2: C9.2 RN3.15 U5.1 | length 352.1
  Bottom Layer w7: C9.2@3358.8,497.05 3366.14,489.7 3366.14,442.91 3375.98,433.07 3375.98,393.7 3457.32,312.36 3457.32,254.57 ; U5.1@3438.57,253.04 3438.57,253.83 3439.32,254.57 3457.32,254.57 ; RN3.15@3502.8,246.06 3500.09,248.76 3481.14,248.76 3475.33,254.57 3457.32,254.57
S3: C10.2 RN3.14 U5.3 | length 455.6
  Bottom Layer w6: U5.3@3410.41,252.06 3410.41,225.57 3415.16,220.82 3484.19,220.82 3487.03,223.66 3500.09,223.66 3505.5,229.08 3520.1,229.08 3529.32,238.29 3529.32,288.4 3435.04,382.67 3435.04,489.3 C10.2@3442.8,497.05
S4: C11.2 RN3.13 U6.1 | length 305.3
  Bottom Layer w6: U6.1@3444.18,204.83 3451.66,204.83 3455.65,208.82 3500.66,208.82 RN3.13@3502.8,206.68 3504.5,208.39 3525.13,208.39 3542.32,225.57 3542.32,298.57 3610.8,367.06 C11.2@3637.79,367.06
S5: C13.1 RN3.12 U6.3 | length 532.2
  Bottom Layer w6: U6.3@3445.17,177.28 3451.66,177.28 3455.88,173.06 3472.8,173.06 3484.03,184.29 3490.03,184.29 RN3.12@3492.8,187.06 ; RN3.12@3502.8,187 3505.5,184.29 3533.28,184.29 3536.8,180.78 3536.8,111.98 3540.31,108.46 3677.56,108.46 3688.03,118.94 3691.15,118.94 3691.27,119.06 3696.11,119.06 3701.67,124.62 3701.67,229.04 3700.8,229.92 3700.8,320.06 C13.1@3698.8,322.06
SCK: J3.3 U2.15 | length 331.9
  Top Layer w6: J3.3@3205.71,72.64 3230.29,48.06 3245.29,48.06 3245.46,47.89 3281.55,47.89 3291.73,58.07 3291.73,105.04 3295.75,109.06 3389.44,109.06 3414.74,134.36 3432.8,134.36 3448.19,149.75 U2.15@3448.19,159.25
SK6812_CTRL_1: P2.1 R3.1 | length 72.8
  Bottom Layer w10: R3.1@3705.75,26.48 3734.74,26.48 P2.1@3765.75,57.48
SK6812_CTRL_2: P2.2 R4.1 | length 72.5
  Bottom Layer w10: P2.2@3777.8,159.06 3777.8,217.26 R4.1@3787.89,227.36
SPEED1: RN1.1 RN3.1 U4.10 | length 871.6
  Top Layer w8: U4.10@3080.8,225.06 3102.67,225.06 3128.52,199.21 v2(3128.52,198.93)
  Layer 2 w8: v2(3128.52,198.93) 3188.87,198.93 3247.73,257.79 3271.53,257.79 3358.78,345.04 3445.7,345.04 3459.7,331.04 3627.08,331.04 3676.63,281.5 v1(3676.63,281.14)
  Bottom Layer w6: RN3.1@3574.84,265.74 3654.48,265.74 3669.46,280.72 3676.2,280.72 v1(3676.63,281.14)
  Bottom Layer w8: RN1.1@3113.17,262.01 3113.17,214.56 3128.52,199.21 v2(3128.52,198.93)
SPEED2: RN1.2 RN3.2 U4.9 | length 922.5
  Top Layer w8: U4.9@3058.8,225.06 3060.72,223.13 3060.72,210.11 3081.92,188.91 3100.94,188.91 v1(3101.8,188.06)
  Layer 2 w8: v1(3101.8,188.06) 3103.89,188.06 3110.89,181.06 3190.8,181.06 3253.53,243.79 3277.33,243.79 3353.59,320.06 3396.85,320.06 3407.84,331.04 3439.9,331.04 3453.9,317.04 3548.81,317.04 3603.8,262.06 3641.59,262.06 3646.59,257.06 v2(3677.8,257.06)
  Bottom Layer w6: RN3.2@3574.84,246.06 3612.52,246.06 3616.52,250.06 3669.41,250.06 3676.41,257.06 v2(3677.8,257.06)
  Bottom Layer w8: RN1.2@3093.48,262.01 3093.48,211.93 3100.31,205.1 3100.31,189.54 v1(3101.8,188.06)
SPEED3: RN1.3 RN3.3 U4.8 | length 841.6
  Top Layer w8: U4.8@3039.43,224.57 3041.03,222.97 3041.03,199.82 3086.84,154.01 v1(3086.84,152.8)
  Layer 2 w8: v1(3086.84,152.8) 3087.59,152.06 3249.34,152.06 3258.22,143.18 3446.62,143.18 3533.37,229.93 v1(3627.92,229.93)
  Bottom Layer w6: RN3.3@3574.84,226.37 3616.01,226.37 3617.71,228.06 3626.06,228.06 v1(3627.92,229.93)
  Bottom Layer w8: RN1.3@3073.8,262.01 3073.8,167.16 3086.84,154.12 v1(3086.84,152.8)
SPEED4: RN1.4 RN3.4 U7.7 | length 1234
  Top Layer w8: U7.7@2976.8,494.06 2977.8,493.06 v2@3020.8,493.06
  Layer 1 w8: v2(3022.8,493.06) 3022.8,340.27 3043.8,319.27 v1(3043.8,171.33)
  Layer 2 w8: v1(3043.8,171.33) 3043.8,170.57 3079.44,134.93 3246.67,134.93 3252.42,129.18 3452.76,129.18 3535.63,212.06 3643.7,212.06 3656.7,225.06 v2(3658.8,225.06)
  Bottom Layer w6: RN3.4@3574.84,206.68 3604.39,206.68 3609.7,211.99 3645.73,211.99 v2(3658.8,225.06)
  Bottom Layer w8: v1(3043.8,171.33) 3043.8,173.43 3054.11,183.74 RN1.4@3054.11,262.01
SPEED5: RN1.5 RN3.5 U7.6 | length 1465
  Top Layer w8: U7.6@2976.8,520.06 3041.8,520.06 v2@3042.8,521.06
  Layer 1 w8: v1(3038.25,132.6) 3038.25,134.7 3025.8,147.15 3025.8,314.1 3002.8,337.1 3002.8,504.06 3016.8,518.06 v2(3041.8,518.06)
  Layer 2 w8: v1(3038.25,132.6) 3061.45,132.6 3073.59,120.46 3241.34,120.46 3246.62,115.18 3462.92,115.18 3545.73,197.99 3660.73,197.99 v1(3683.92,221.18)
  Bottom Layer w6: RN3.5@3574.84,187 3612.82,187 3623.81,197.99 3677.11,197.99 3683.55,204.43 3683.55,220.81 v1(3683.92,221.18)
  Bottom Layer w8: RN1.5@3034.43,262.01 3034.43,210.46 3025.92,201.96 3025.92,147.03 3038.25,134.7 v1(3038.25,132.6)
VCC: RN1.16 U2.17 U3.14 U4.1 U4.18 U5.5 U6.5 U7.1 U7.4 U8.1 | length 1953.1
  Top Layer w8: v1(2952.8,391.06) 2952.8,388.96 2960.69,381.07 U4.1@2960.69,342.68 ; U4.18@3039.43,382.06 3039.43,361.43 3043.48,357.37 3086.65,357.37 3094.4,365.12 3094.4,365.82 3099.09,370.51 v1(3111.35,370.51) ; U8.1@3066.93,67.85 3066.93,73.85 3073.99,80.91 3073.99,95.25 3146.67,167.93 3146.67,205.82 3142.75,209.73 3142.75,213.51 3131.31,224.96 v1@3131.31,226.79 ; U7.4@3148.8,545.06 3153.3,540.56 3178.94,540.56 3186.8,532.7 3186.8,481.41 3178.94,473.56 3172.8,473.56 U7.1@3169.8,470.56 ; v2(3236.28,190.57) 3237.25,191.54 3242.52,191.54 3249.3,198.32 U3.14@3249.3,224.56 ; U2.17@3483.19,159.25 3483.19,126.57 3488.67,121.08 3488.67,104.18 v1(3490.16,102.69)
  Layer 1 w8: v1(3111.35,370.51) 3111.35,369.5 3152.8,328.06 3152.8,248.54 v1(3131.31,227.06) ; v1(3380.66,162.19) 3440.16,102.69 v1(3490.16,102.69)
  Layer 2 w8: v1(2952.8,391.06) 3039.8,391.06 3117.8,469.06 v1(3143.8,469.06) 3143.8,444.39 3107.42,408.02 3107.42,374.44 v1(3111.35,370.51) ; v1(3131.31,227.06) 3114.77,210.52 3098.98,210.52 3081.8,193.33 3081.8,182.06 3093.17,170.68 3094.24,170.68 3098.87,166.06 3211.77,166.06 v2(3236.28,190.57) 3288.28,190.57 ; v1(3380.66,162.19) 3375.64,157.18 3321.67,157.18 3288.28,190.57 ; v2(3394.14,300.03) 3410.8,283.38 3410.8,264.74 3401.24,255.18 3379.9,255.18 3353.8,229.08 3353.8,220.06 3324.31,190.57 3288.28,190.57
  Bottom Layer w6: v1(3380.66,162.19) 3382.33,162.19 3396.19,176.06 3396.19,184.76 3402.44,191.02 U6.5@3416.43,191.06 U6.5@3416.43,191.06 ; v2(3394.14,300.03) 3418.09,300.03 3424.06,294.07 3424.06,281.54 U5.5@3424.8,280.8
  Bottom Layer w8: v1(3111.35,370.51) 3112.26,369.6 3112.26,334.96 RN1.16@3113.17,334.06
VLIPO: C2.2 J2.1 J3.2 P1.1 R1.2 U1.3 U2.3 U2.16 U8.3 U8.4 | length 3637.7
  Top Layer w6: J3.2@3255.71,22.64 3255.79,22.72 3283.46,22.72 3304.73,43.99 3304.73,93.54 3308.25,97.06 3394.41,97.06 3419.36,122.01 3445.59,122.01 3464.69,141.11 3464.69,157.75 U2.16@3466.19,159.25
  Top Layer w8: U8.4@3108.66,67.85 3111.38,70.57 3111.38,71.59 3110.03,72.94 3135.56,98.47 3135.64,98.47 3135.68,98.5 v2(3139.68,98.5) ; U8.4@3111.93,68.92 3112.87,67.98 3112.87,42.67 ; U2.3@3519.19,313.25 3520.69,314.75 3520.69,339.67 3536.42,355.4 3536.42,458.96 3541.1,463.65 3624.08,463.65 J2.1@3641.73,481.3 3643.98,479.06 v1(3686.8,479.06) 3718.8,479.06 3769.8,428.06 3769.8,268.06 3812.8,225.06 3812.8,123.62 P1.1@3877.95,58.46
  Layer 2 w8: v2(3139.68,98.5) 3125.59,98.5 3117.64,106.46 3039.12,106.46 3020.37,125.2 3020.37,194.63 3142.67,316.93 3142.67,394.06 3227.67,479.06 3825.8,479.06 3865.8,439.06 3865.8,391.06 3701.8,227.06 3701.8,127.06 3686.8,112.06 3614.8,112.06 3599.8,97.06 3599.8,41.06 3577.28,18.54 3259.8,18.54 J3.2@3255.71,22.64
  Bottom Layer w8: v1(3686.8,479.06) 3711.8,479.06 C2.2@3720.8,470.06
  Bottom Layer w10: C2.2@3728.35,471.95 3728.35,471.2 3739.09,460.45 3757.07,460.45 3772.64,444.88 3847.44,444.88 3861.69,459.13 3861.69,488.86 U1.3@3868.11,495.28 3868.11,550.69 R1.2@3858.76,560.04
  other v1: 3640.8,479.06
pads on no net: J1.2 J1.3 J1.4 RN1.6 RN1.7 RN1.8 RN1.9 RN1.10 RN2.6 RN2.7 RN2.8 RN2.9 RN2.10 RN2.11 RN3.6 RN3.7 RN3.8 RN3.9 RN3.10 RN3.11 U2.19 U3.15 U4.21

## Silkscreen, mask and mechanical layers (free items; w line width, h text height)
Bottom Overlay:
  text "REV 1.0" at 423,444 h60
  text "Smart Glasses Control Board Prototype" at 2745,426 h60
  text "Jonathan Schallert 2021" at 2098,148 h40
Board Outline:
  the board outline again, w10